# Altium PCB PCB1.PcbDoc
Units mm, origin at the board's own origin, x right, y up, seen from the top; angles counter-clockwise.
Board outline 43.5 x 43.5 mm, 2 copper layers (Top Layer, Bottom Layer), stack 1.57 mm thick; 59 components, 40 nets, 191 pads, 27 vias.
Unrouted connection lines stored in the file: 38.
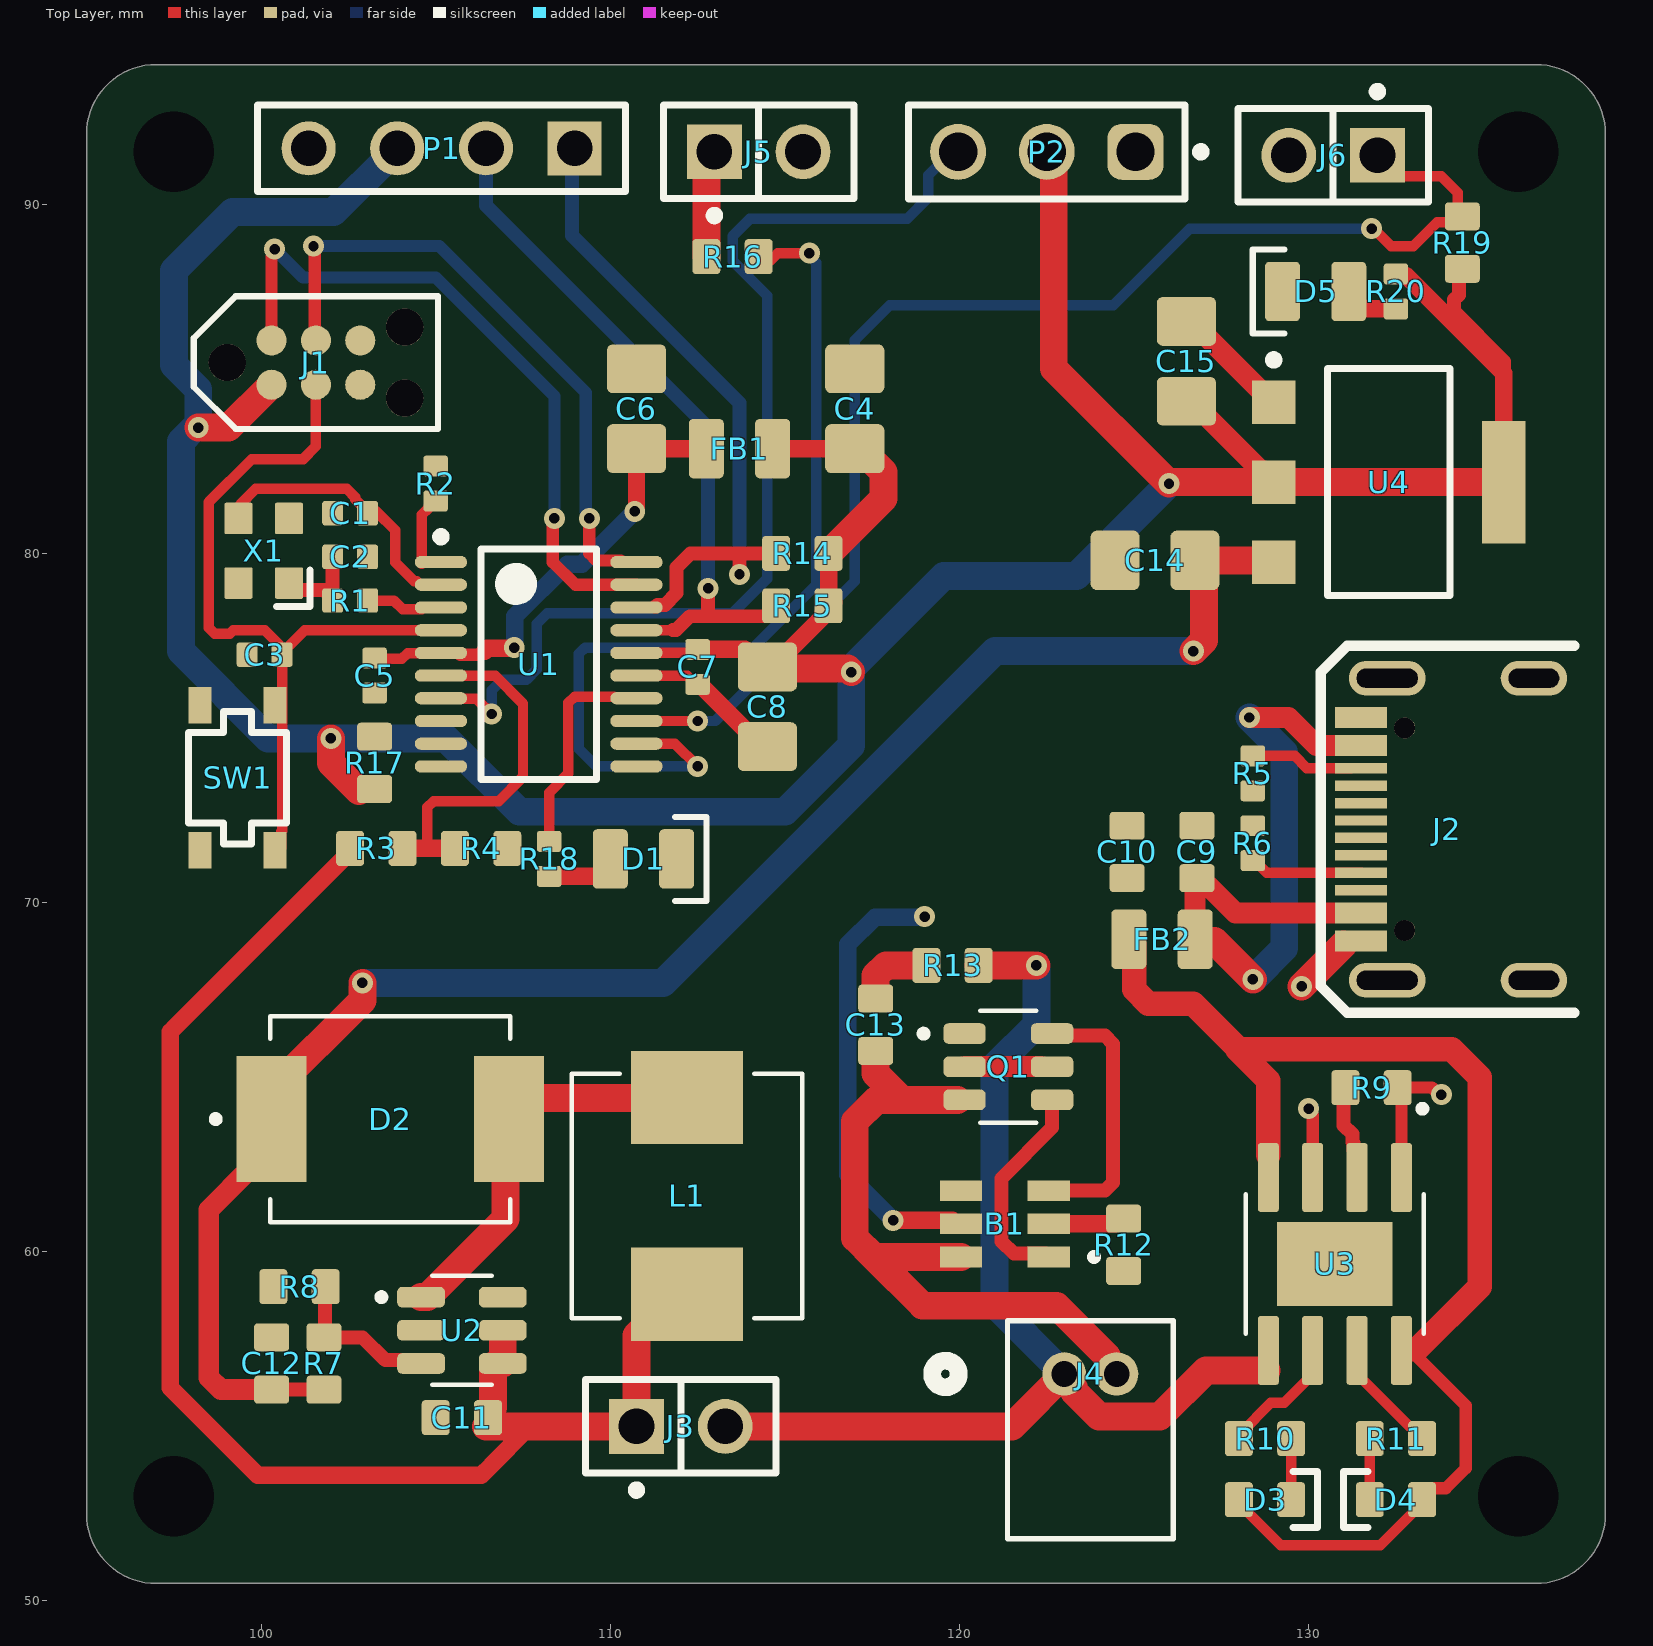
[diagram p0: Top Layer view]
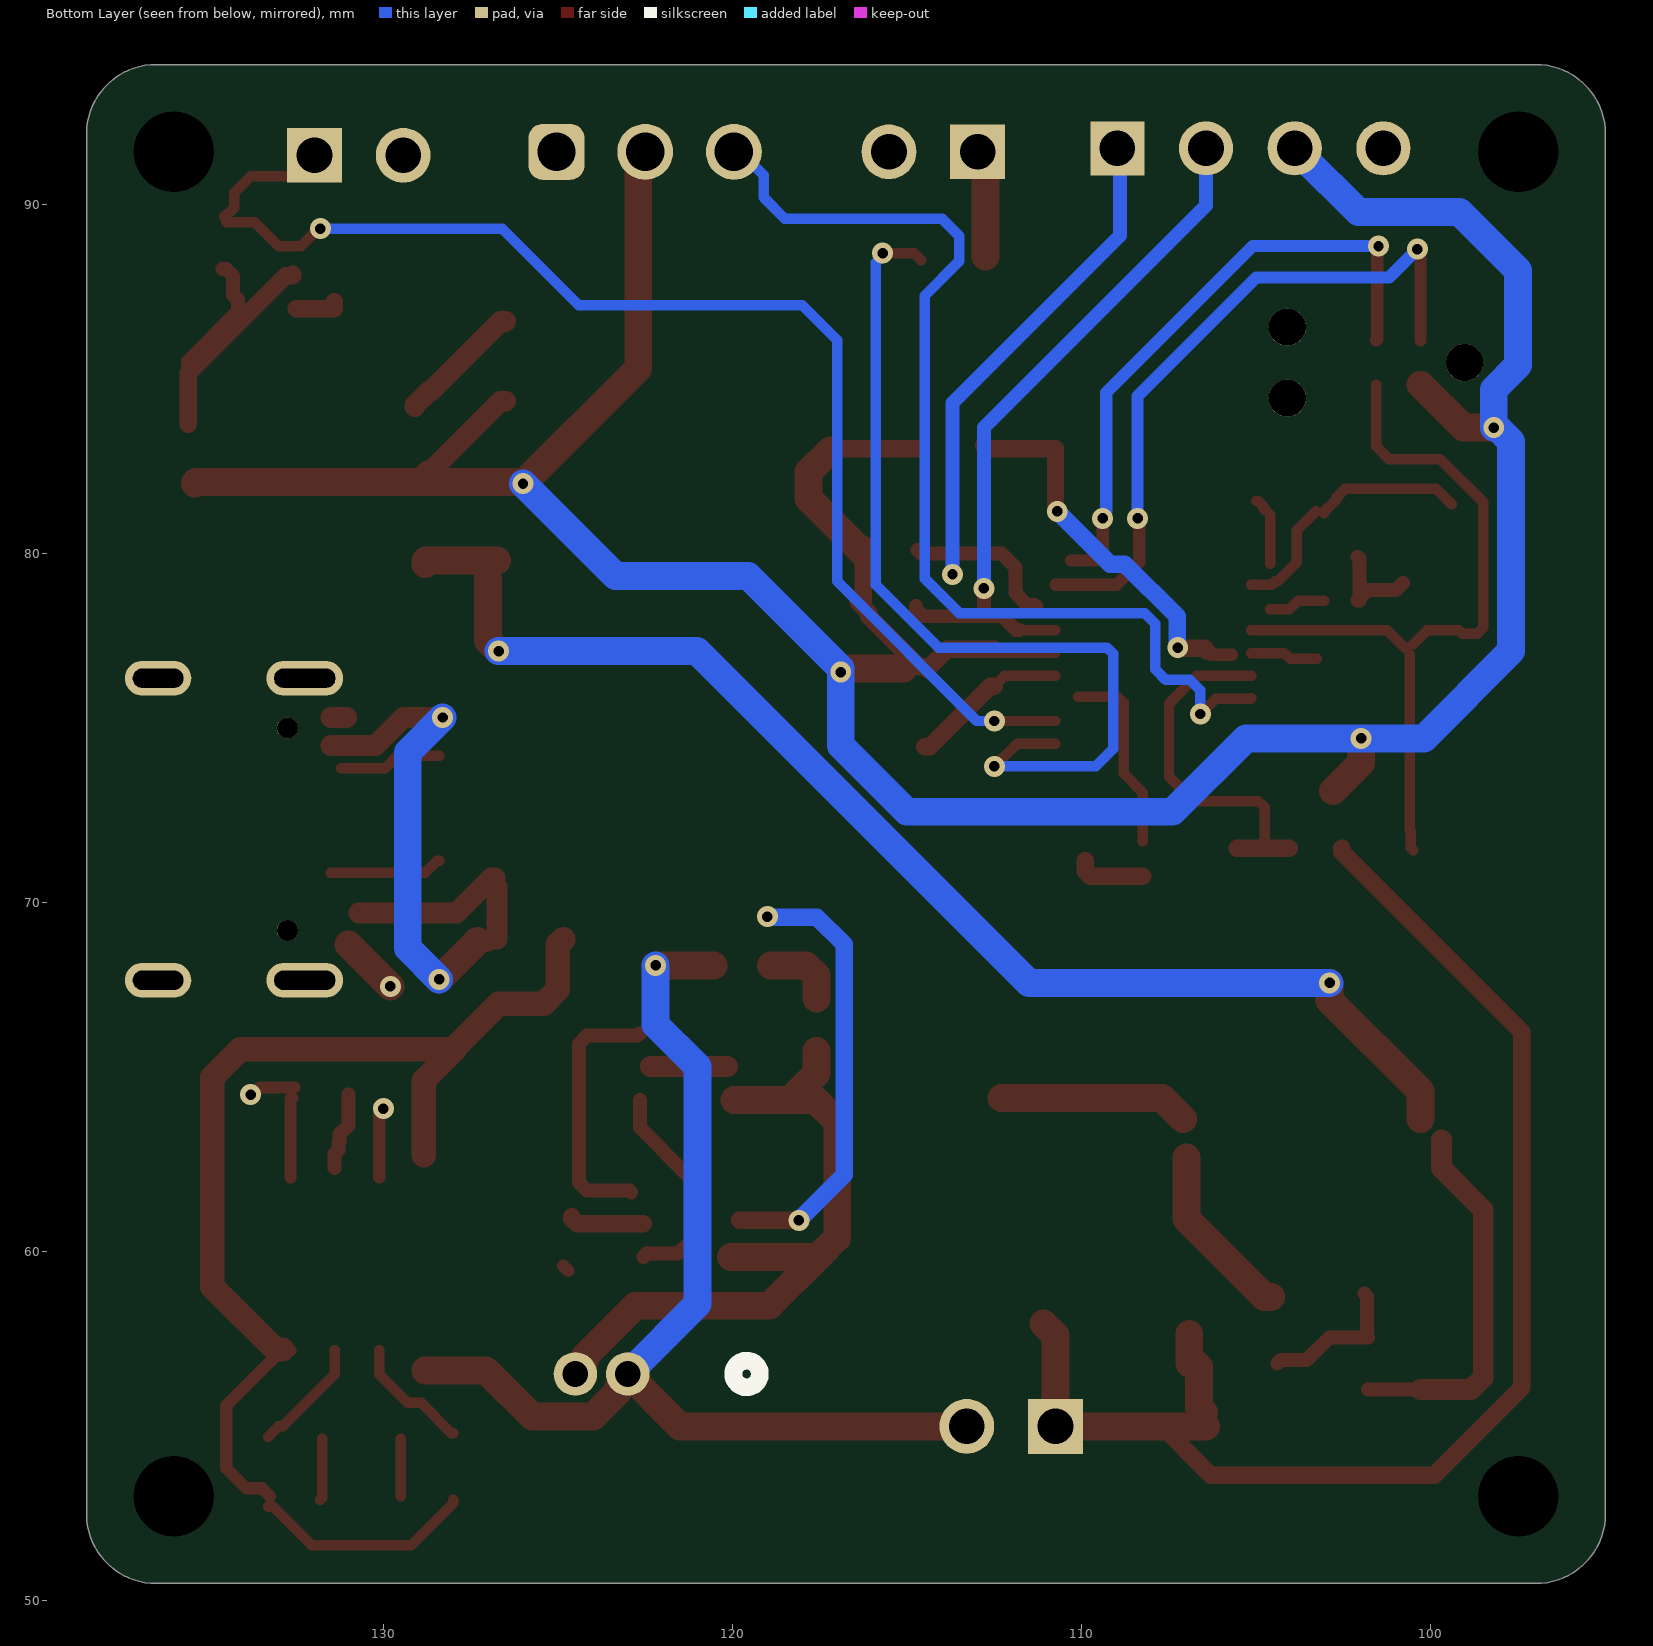
[diagram p1: Bottom Layer view, seen from below]
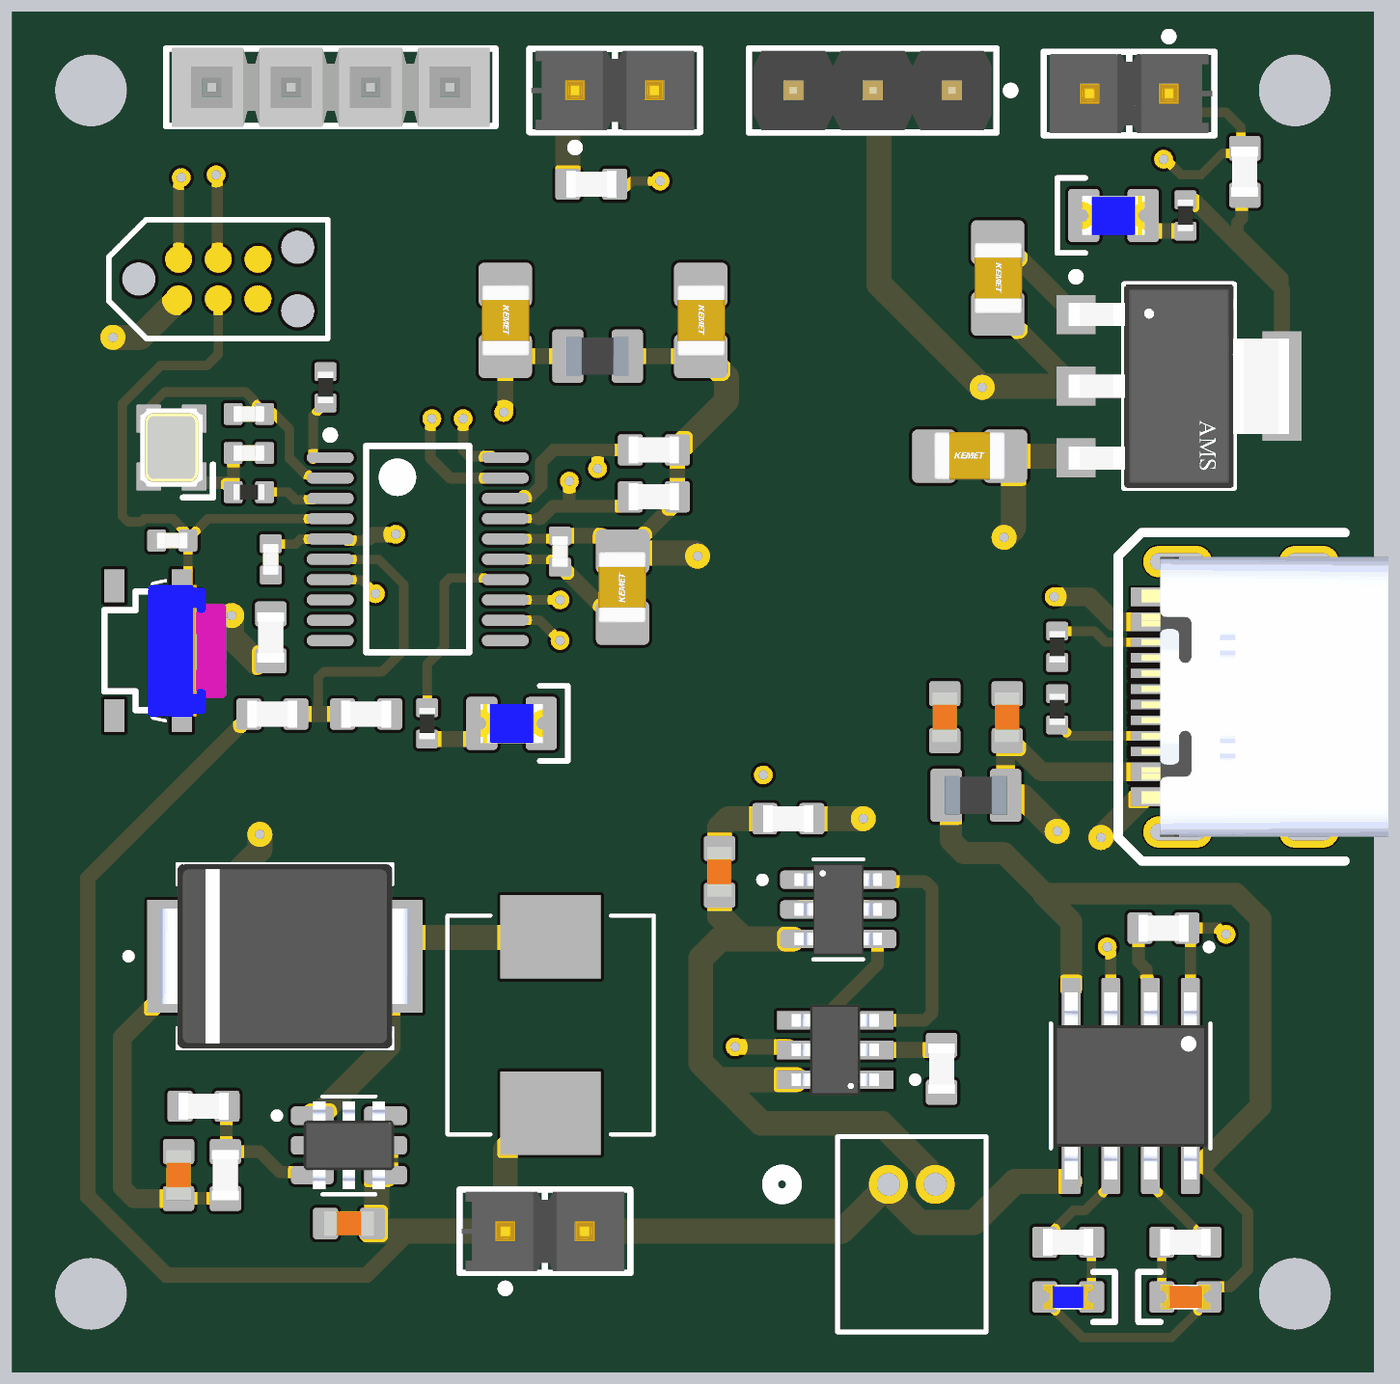
[diagram p2: 3D render of the assembled board from above, using the file's embedded part models]

## Layer stack, top to bottom
Top Solder: solder mask 0.0127, Solder Resist, Dk 3.5
Top Layer: signal copper 0.035
Dielectric 1: dielectric 1.5, FR-4, Dk 4.8
Bottom Layer: signal copper 0.035
Bottom Solder: solder mask 0.0127, Solder Resist, Dk 3.5

## Board outline
95,52.5 95,92 cw(c97,92) 97,94 136.5,94 cw(c136.5,92) 138.5,92 138.5,52.5 cw(c136.5,52.5) 136.5,50.5 97,50.5 cw(c97,52.5)

## Design rules (kind name [scope] priority, off if disabled: settings)
BoardOutlineClearance [All] p1: gap=0.2 ignorepadtopadclearanceinfootprint=FALSE
Clearance [All] p1: gap=0.2 ignorepadtopadclearanceinfootprint=FALSE
ComponentClearance [All] p1: gap=0.127 collisioncheckmode=3 verticalgap=0.127 showdistances=TRUE
DiffPairsRouting [All] p1: maxlimit=0.254 minlimit=0.127 mostfreqgap=0.127 toplayer_minwidth=0.127 toplayer_maxwidth=25.4 toplayer_prefwidth=0.127 bottomlayer_minwidth=0.127 bottomlayer_maxwidth=25.4 bottomlayer_prefwidth=0.127 maxuncoupledlength=12.7
Height [All] p1: minheight=0 maxheight=1816.048 prefheight=12.7
HoleSize [All] p1: absolutevalues=TRUE maxlimit=6.3 minlimit=0.3 maxpercent=80.000 minpercent=20.000
HoleToHoleClearance [All] p1: gap=0.25 allowstackedmicrovias=FALSE
MinimumAnnularRing [All] p1: minimumring=0.3
MinimumSolderMaskSliver [All] p1: minsoldermaskwidth=0
PlaneClearance [All] p1: clearance=0.127
PlaneConnect PlaneConnectPowerPads [InPadClass('PowerPads')] p1: planeconnectstyle=Direct reliefexpansion=0.508 reliefentries=4 reliefconductorwidth=0.254 reliefairgap=0.254
PlaneConnect [All] p2: pad.planeconnectstyle=Relief pad.reliefexpansion=0.3 pad.reliefentries=4 pad.reliefconductorwidth=0.127 pad.reliefairgap=0.127 via.planeconnectstyle=Direct via.reliefexpansion=0.3 via.reliefentries=4 via.reliefconductorwidth=0.127 via.reliefairgap=0.127
PolygonConnect PolygonConnectPowerPads [All vs (InPadClass('PowerPads'))] p1: connectstyle=Direct reliefconductorwidth=0.254 reliefentries=4 polygonreliefangle="90 Angle" airgapwidth=0.254
PolygonConnect [All] p2: thpad.connectstyle=Relief thpad.reliefconductorwidth=0.127 thpad.reliefentries=4 thpad.polygonreliefangle="90 Angle" thpad.airgapwidth=0.127 smdpad.connectstyle=Relief smdpad.reliefconductorwidth=0.127 smdpad.reliefentries=4 smdpad.polygonreliefangle="90 Angle" smdpad.airgapwidth=0.127 via.connectstyle=Direct via.reliefconductorwidth=0.127 via.reliefentries=4 via.polygonreliefangle="90 Angle" via.airgapwidth=0.127
RoutingVias [All] p1: holewidth=0.3 width=0.6 viastyle="Through Hole" minholewidth=0.3 minwidth=0.6 maxholewidth=0.6 maxwidth=6.6
SilkToSilkClearance [All] p1: silktosilkclearance=0
SilkToSolderMaskClearance [IsPad] p1: minsilkscreentomaskgap=0.127 clearancetoexposedcopper=TRUE
SolderMaskExpansion SolderMaskExpansion_TENted [IsVia] p1: expansion=0.102 istentingtop=FALSE
SolderMaskExpansion [All] p2: expansion=0.102 istentingtop=FALSE
SupplyNets "Schematic Supply Nets_4" [InNet('+3V3A')] p1: voltage=0.000
SupplyNets "Schematic Supply Nets_3" [InNet('+5_IN')] p2: voltage=0.000
SupplyNets "Schematic Supply Nets_2" [InNet('GND')] p3: voltage=0.000
SupplyNets "Schematic Supply Nets_1" [InNet('+5')] p4: voltage=0.000
SupplyNets "Schematic Supply Nets" [InNet('+3V3')] p5: voltage=0.000
UnRoutedNet [All] p1: checkbadconnections=TRUE
Width [All] p1: maxlimit=1 minlimit=0.2 preferedwidth=0.3 minimp=50.000000 maximp=50.000000 favimp=50.000000
19 further rules are at their usual default settings.

## Classes and differential pairs
component class MCU: C1 C2 C3 C4 C5 C6 C7 C8 D1 FB1 J1 R1 R2 R3 R4 R18 SW1 U1 X1
component class Conectors: J5 J6 P1 P2 R14 R15 R16 R17 R19
component class Battery_Management: B1 C9 C10 C11 C12 C13 C14 C15 D2 D3 D4 D5 FB2 J2 J3 J4 L1 Q1 R5 R6 R7 R8 R9 R10 R11 R12 R13 R20 U2 U3 U4

## Components (designator, comment, footprint, x,y, rotation, side; value= is the part's Value field where it differs from the comment)
B1 "FS312F-G" SOT95P280X145-6N#1 121.3,60.8 r180 top
C1 "12 pF" CAP_0402 102.55,81.15 r180 top
C2 "12 pF" CAP_0402 102.55,79.9 r0 top
C3 "100 nF" CAP_0402 100.1,77.1 r180 top
C4 "1 uF" CAP_0805 117,84.143 r270 top
C5 "10 nF" CAP_0402 103.25,76.5 r90 top
C6 "1 uF" CAP_0805 110.75,84.143 r270 top
C7 "100 nF" CAP_0402 112.5,76.75 r90 top
C8 "1 uF" CAP_0805 114.5,75.607 r90 top
C9 "100n" CAP_0603 126.8,71.45 r270 top
C10 "100n" CAP_0603 124.8,71.45 r270 top
C11 "22u" CAP_0603 105.75,55.25 r180 top
C12 "22u" CAP_0603 100.3,56.8 r90 top
C13 "0.1u" CAP_0603 117.6,66.5 r90 top
C14 "10u" CAP_0805 125.6,79.8 r0 top
C15 "22u" CAP_0805 126.5,85.5 r270 top
D1 "BLUE" LED_0805_BLUE 110.95,71.25 r180 top
D2 "SS34" DIO_SS34 103.7,63.8 r0 top
D3 "BLUE" LED_0603_BLUE 128.75,52.9 r180 top
D4 "RED" LED_0603_RED 132.5,52.9 r0 top
D5 "BLUE" LED_0805_BLUE 130.2,87.5 r0 top
FB1 "120R" FB_0805 113.7,83 r180 top
FB2 "120R" FB_0805 125.8,68.95 r180 top
J1 "TC2030-NL" TC2030-NL-FP 101.57,85.465 r0 top
J2 "TYPE-C-31-M-12" TYPE-C-31-M-12 134.35,72.1 r90 top
J3 "TSW-102-14-G-S" FP-TSW-102-14-G-S-MFG 112.02,55 r0 top
J4 "S2B-ZR(LF)(SN)" CONN_S2B-ZR_JST 123,56.5 r0 top
J5 "TSW-102-14-G-S" FP-TSW-102-14-G-S-MFG 114.25,91.5 r0 top
J6 "TSW-102-14-G-S" FP-TSW-102-14-G-S-MFG 130.7,91.4 r180 top
L1 "MWSA0603S-220MT" INDM7066X300N 112.2,61.6 r90 top
P1 "HMTSW-104-23-F-S-237" SMTC-HMTSW-104-23-X-S-237 108.98,91.6 r180 top
P2 "61300311121" 61300311121 122.5,91.5 r180 top
Q1 "FS8205" SOT95P280X145-6N#2 121.4,65.3 r0 top
R1 "0R" RES_0402 102.55,78.65 r180 top
R2 "100K" RES_0402 105,82 r90 top
R3 "100k" RES_0603 103.3,71.55 r180 top
R4 "100k" RES_0603 106.3,71.55 r180 top
R5 "5.1k" RES_0402 128.4,73.7 r90 top
R6 "5.1k" RES_0402 128.4,71.7 r270 top
R7 "160k" RES_0603 101.8,56.8 r270 top
R8 "22K" RES_0603 101.1,59 r0 top
R9 "1.3K" RES_0603 131.8,64.7 r180 top
R10 "1K" RES_0603 128.75,54.65 r0 top
R11 "1K" RES_0603 132.5,54.65 r180 top
R12 "2K" RES_0603 124.7,60.2 r90 top
R13 "100" RES_0603 119.8,68.2 r0 top
R14 "4.7K" RES_0603 115.5,80 r0 top
R15 "4.7K" RES_0603 115.5,78.5 r0 top
R16 "120" RES_0603 113.5,88.5 r180 top
R17 "12K" RES_0603 103.25,74 r90 top
R18 "270R" RES_0402 108.25,71.25 r270 top
R19 "4.7K" RES_0603 134.4,88.9 r90 top
R20 "270R" RES_0402 132.5,87.5 r270 top
SW1 "SKRPANE010" SKRPANE010 99.325,73.575 r270 top
U1 "STM32F030F4P6" STM-TSSOP20_L 107.95,76.825 r0 top
U2 "MT3608" SOT95P280X145-6N#3 105.75,57.75 r0 top
U3 "TP4056" SOP127P600X175-9N 130.75,59.65 r270 top
U4 "AMS1117-3.3" FP-AMS1117-IPC_C 132.295,82.04 r0 top
X1 "12 MHZ" XTAL_2520 100.075,80.075 r90 top

## Footprints (in the part's own frame and the unit in brackets; to place one, negate y for a bottom-side part, rotate by r counter-clockwise, add the part's x,y. Pads: shape width x height; smd on the part's side, far side on the other; paste and mask are expansions set on the pad)
61300311121 [mm] "Pin Header, pitch 2.54 mm, THT, Vertical, single row, 3p"
  rrect50% 1.6x1.6 hole 1.1: 1(-2.54,0)
  round 1.6 hole 1.1: 2(0,0) 3(2.54,0)
  silkscreen extent -4.53,-1.35 3.96,1.35, body extent -3.81,-1.27 3.81,1.27, height 8.57
CAP_0402 [mm]
  rrect25% 0.6x0.7 smd: 1(-0.5,0) 2(0.5,0)
  body extent -0.5,-0.26 0.5,0.26, height 0.37
CAP_0603 [mm]
  rrect25% 0.8x1 smd: 1(-0.75,0) 2(0.75,0)
  body extent -0.8,-0.4 0.8,0.4, height 0.51
CAP_0805 [mm]
  rrect25% 1.4x1.7 smd: 1(-1.143,0) 2(1.143,0)
  body extent -1.15,-0.76 1.15,0.79, height 1.01
CONN_S2B-ZR_JST [mil]
  round 49 / inner round 60 / far side round 49 hole 29 paste-99999 mask+0: 1(0,0) 2(59.06,0)
  silkscreen extent -149,-186 123,60
DIO_SS34 [mm]
  rect 2x3.6 smd: A(3.4,0) C(-3.4,0)
  silkscreen extent -5.1,-2.95 3.44,2.95, body extent -3.98,-2.95 3.98,2.95, height 2.65
FB_0805 [mm]
  rrect25% 1x1.7 smd: 1(-0.95,0) 2(0.95,0)
  body extent -1,-0.63 1,0.63, height 0.86
FP-AMS1117-IPC_C [mm]
  rect 1.25x1.25 smd paste+0 mask+0: 1(-3.295,2.29) 2(-3.295,0) 3(-3.295,-2.29)
  rect 1.25x3.5 smd paste+0 mask+0: 4(3.295,0)
  silkscreen extent -3.42,-3.25 1.75,3.62, body extent -3.9,-3.35 3.9,3.35, height 0.25
FP-TSW-102-14-G-S-MFG [mm]
  rect 1.57x1.57 hole 1.02 paste-2539.97 mask+0: 1(-1.27,0)
  round 1.57 hole 1.02 paste-2539.97 mask+0: 2(1.27,0)
  silkscreen extent -2.73,-1.95 2.73,1.34, body extent -2.83,-1.44 2.83,1.44, height 0.25
INDM7066X300N [mm]
  rect 2.67x3.21 smd: 1(-2.82,0) 2(2.82,0)
  silkscreen extent -3.5,-3.3 3.5,3.3
LED_0603_BLUE [mm]
  rrect25% 0.8x1 smd: A(0.75,0) K(-0.75,0)
  silkscreen extent -1.5,-0.8 -0.8,0.8, body extent -0.8,-0.4 0.8,0.4, height 0.6
LED_0603_RED [mm]
  rrect25% 0.8x1 smd: A(0.75,0) K(-0.75,0)
  silkscreen extent -1.5,-0.8 -0.8,0.8, body extent -0.8,-0.4 0.8,0.4, height 0.6
LED_0805_BLUE [mm]
  rrect25% 1x1.7 smd: A(0.95,0) K(-0.95,0)
  silkscreen extent -1.8,-1.2 -0.9,1.2, body extent -1,-0.63 1,0.63, height 1.12
RES_0402 [mm]
  rrect25% 0.6x0.7 smd: 1(-0.5,0) 2(0.5,0)
  body extent -0.5,-0.25 0.5,0.25, height 0.3
RES_0603 [mm]
  rrect25% 0.8x1 smd: 1(-0.75,0) 2(0.75,0)
  body extent -0.8,-0.43 0.8,0.43, height 0.52
SKRPANE010 [mm]
  rect 1.05x0.65 smd: 12(-2.075,1.075) 12(2.075,1.075) 34(-2.075,-1.075) 34(2.075,-1.075)
  silkscreen extent -1.9,-1.4 1.9,1.4, body extent -2.3,-1.6 2.3,1.6, height 2.51
SMTC-HMTSW-104-23-X-S-237 [mm] "Terminal Strip, 1x2 Pins, Vertical, 2.54mm Pitch, Male"
  rect 1.55x1.55 hole 1.02: 1(0,0)
  round 1.55 hole 1.02: 2(2.54,0) 3(5.08,0) 4(7.62,0)
  silkscreen extent -1.46,-1.24 9.08,1.24, body extent -1.27,-1.27 8.89,1.27, height 8.56
SOP127P600X175-9N [mm]
  rrect25% 1.97x0.6 smd: 1(-2.475,1.905) 2(-2.475,0.635) 3(-2.475,-0.635) 4(-2.475,-1.905) 5(2.475,-1.905) 6(2.475,-0.635) 7(2.475,0.635) 8(2.475,1.905)
  rect 2.413x3.302 smd paste-3: 9(0,0)
  silkscreen extent -4.54,-2.55 2,2.6, body extent -3,-2.45 3,2.45, height 1.75
SOT95P280X145-6N#1 [mm]
  rect 1.21x0.59 smd: 1(-1.255,0.95) 2(-1.255,0) 3(-1.255,-0.95) 4(1.255,-0.95) 5(1.255,0) 6(1.255,0.95)
  silkscreen extent -2.66,0.85 -2.46,1.05, body extent -1.4,-1.45 1.4,1.45, height 1.45
SOT95P280X145-6N#2 [mm]
  rrect50% 1.21x0.59 smd: 1(-1.255,0.95) 2(-1.255,0) 3(-1.255,-0.95) 4(1.255,-0.95) 5(1.255,0) 6(1.255,0.95)
  silkscreen extent -2.53,-1.6 0.8,1.6, body extent -1.4,-1.45 1.4,1.45, height 1.45
SOT95P280X145-6N#3 [mm]
  rrect50% 1.37x0.59 smd: 1(-1.17,0.95) 2(-1.17,0) 3(-1.17,-0.95) 4(1.17,-0.95) 5(1.17,0) 6(1.17,0.95)
  silkscreen extent -2.4,-1.57 0.85,1.57, body extent -1.45,-1.4 1.45,1.4, height 1.45
STM-TSSOP20_L [mm] "SOP, 20-Leads, Body 6.6x4.5mm, Pitch 0.65mm, IPC High Density"
  oval 1.5x0.35 smd: 1(-2.8,2.925) 2(-2.8,2.275) 3(-2.8,1.625) 4(-2.8,0.975) 5(-2.8,0.325) 6(-2.8,-0.325) 7(-2.8,-0.975) 8(-2.8,-1.625) 9(-2.8,-2.275) 10(-2.8,-2.925) 11(2.8,-2.925) 12(2.8,-2.275) 13(2.8,-1.625) 14(2.8,-0.975) 15(2.8,-0.325) 16(2.8,0.325) 17(2.8,0.975) 18(2.8,1.625) 19(2.8,2.275) 20(2.8,2.925)
  silkscreen extent -2.92,-3.3 1.65,3.77, body extent -2.25,-3.3 2.25,3.3, height 1.2
TC2030-NL-FP [mil]
  round 33.98 smd paste-16.99: 1(-50,-25) 2(-50,25) 3(0,-25) 4(0,25) 5(50,-25) 6(50,25)
  round 42.01 hole 42.01 unplated: MH(-100,0) MH(100,-40) MH(100,40)
  silkscreen extent -138,-75 138,75
TYPE-C-31-M-12 [mm]
  rect 0.6x1.5 smd mask+0.07: A1B12(-3.2,2.85) B1A12(3.2,2.85)
  rect 0.6x1.5 smd mask+0.14: A4B9(-2.4,2.85) B4A9(2.4,2.85)
  rect 0.3x1.5 smd mask+0.14: A5(-1.25,2.85) A6(-0.25,2.85) A7(0.25,2.85) A8(1.25,2.85) B5(1.75,2.85) B6(0.75,2.85) B7(-0.75,2.85) B8(-1.75,2.85)
  round 0.6 hole 0.6 unplated mask+0.3: MH(-2.9,1.6) MH(2.9,1.6)
  oval 1x1.9 hole 0.55 slot 1.45 at 90 deg mask+0.05: SH(-4.325,-2.1) SH(4.325,-2.1)
  oval 1x2.2 hole 0.55 slot 1.75 at 90 deg mask+0.05: SH(-4.325,2.1) SH(4.325,2.1)
  silkscreen extent -5.25,-3.25 5.25,4, body extent -4.47,-4.65 4.47,3.25, height 3.32
XTAL_2520 [mm]
  rrect10% 0.9x0.8 smd mask+0: 1(-0.925,-0.725) 2(0.925,-0.725) 3(0.925,0.725) 4(-0.925,0.725)
  silkscreen extent -1.6,-1.33 -0.54,-0.36, body extent -1.25,-1 1.25,1, height 0.8

## Part data
B1: "One Cell Lithium-ion/Polymer Battery Protection IC", Manufacturer_Name="Fortune Semiconductor Corporation", Datasheet Link=https://www.ic-fortune.com/upload/Download/FS312F-G-DS-12_EN.pdf, Geometry.Height=1.45mm, Manufacturer_Part_Number=FS312F-G
C1 C2 C3 C5 C7: library part CAP_0402, "Capacitor SMD 0402"
C4 C6 C8 C14 C15: library part CAP_0805, "Capacitor SMD 0805"
C9 C10 C11 C12 C13: library part CAP_0603, "Capacitor SMD 0603"
D1 D5: library part LED_0805_BLUE, "LED 0805 BLUE SMD"
D2: "3A, 40V, Schottky Rectifier", Package="DO-214AB-2 Taiwan Semiconductor", Check_prices=https://www.snapeda.com/parts/SS34/Taiwan+Semiconductor/view-part/?ref=eda, MF="Taiwan Semiconductor", MP=SS34, SnapEDA_Link=https://www.snapeda.com/parts/SS34/Taiwan+Semiconductor/view-part/?ref=snap
D3: library part LED_0603_BLUE, "LED 0603 BLUE SMD"
D4: library part LED_0603_RED, "LED 0603 RED SMD"
FB1: library part FB_0805, "Ferrite Bead SMD 0805GZ2012D121TF", Manufacturer Part Number=PZ2012D121-3R0TF
FB2: library part FB_0805, "Ferrite Bead SMD 0805", Manufacturer Part Number=PZ2012D121-3R0TF
J1: "Tag-Connect No-Solder SWD Debug Connector (No Legs) DO NOT PLACE", Manufacturer=Tag-Connect, Manufacturer Part Number=TC2030-NL-FP
J2: "USB Type C Connector Horizontal SMT", Manufacturer="Koren Hroparts", Manufacturer Part Number=TYPE-C-31-M-12
J3 J5 J6: library part CMP-02766-001740-1, "CONN HEADER VERT 2POS 2.54MM", Color=Black, Flammability Rating="UL94 V-0", Max Current Rating=7.6A, Max Operating Temperature=125°C, Max Voltage Rating (AC)=550V, Min Operating Temperature=-55°C, Package Quantity=1, Connector Type=Header, Contact Finish - Mating=GOLD, Contact Material=Bronze, Contact Mating Length=0.32inch, Contact Plating=Gold, Contact Shape=Square, Contact Type="Male Pin", Depth=2.54mm, Fastening Type=Pull, Gender=Male, Housing Color=Black, Housing Material=Polyester, Insulation Color=Black, Insulation Material=PBT, Lead Free="Lead Free", Length=5.08mm, Mount="Through Hole", Number of Contacts=2, Number of Positions=2, Number of Rows=1, Orientation=Straight, Packaging=Bulk, Pitch=2.54mm, Radiation Hardening=No, REACH SVHC="No SVHC", RoHS Compliant=Yes, Series=TSW, Termination=Solder, Width=2.54mm
J4: library part S2B-ZRLFSN, "Description", Manufacturer_Name=JST, Copyright="Copyright (C) 2025 Ultra Librarian. All rights reserved.", Manufacturer_Part_Number=S2B-ZR(LF)(SN), RefDes=RefDes, Type=Type
L1: "22 ÂµH Unshielded Drum Core, Wirewound Inductor 2.5 A 170mOhm Max Nonstandard -", Package=None, Check_prices=https://www.snapeda.com/parts/MWSA0603S-220MT/Shenzhen+Huacan+Tianlu+Electronics+Co.%252C+Ltd./view-part/?ref=eda, MF="Shenzhen Sunlord Electronics Co., Ltd.", MP=MWSA0603S-220MT, SnapEDA_Link=https://www.snapeda.com/parts/MWSA0603S-220MT/Shenzhen+Huacan+Tianlu+Electronics+Co.%252C+Ltd./view-part/?ref=snap
P1: library part CMP-1024-00021-1, "Modified .025\" SQ Post Header, Through-hole, Vertical, -55 to 125 degC, 2.54 mm Pitch, 4-Pin, Male, RoHS", Manufacturer=Samtec, Temperature Range="-55 to 125 degC", ComponentLink1Description="Manufacturer URL", ComponentLink1URL=http://www.samtec.com, ComponentLink2Description=Datasheet, ComponentLink2URL=http://www.samtec.com/documents/webfiles/pdf/HMTSW.PDF, ComponentLink3Description="Package Specification", ComponentLink3URL=http://www.samtec.com/documents/webfiles/cpdf/HMTSW-XXX-XX-X-X-XXXX-XX-XX-MKT1.pdf, DatasheetVersion=F-214, Mounting Technology=Through-hole, Orientation=Vertical, PackageDescription="Assembly .025 [.64] SQ. Post Hi-Temp Terminal Strip", PackageReference=HMTSW-104-23-X-S-237, PackageVersion="AL, 3/1987", PartNumber=HMTSW-104-23-F-S-237, Pitch="2.54 mm", RoHS=True
P2: library part CMP-1502-01062-3, Color=Black, Contact Resistance=20mΩ, Current Rating=3A, Max Operating Temperature=105°C, Min Operating Temperature=-40°C, Operating Supply Voltage=250V, Connector Type="Male Pin", Contact Material=Copper, Contact Mating Length=5.9944mm, Contact Plating=Gold, Gender=Male, Height=8.94mm, Lead Free="Lead Free", Lead Pitch=2.54mm, Mount="Through Hole", NexarPartId=32855521, Number of Contacts=3, Number of Pins=3, Number of Positions=3, Number of Rows=1, Orientation=Vertical, Packaging=Bulk, Pitch=2.54mm, REACH SVHC=Unknown, RoHS=Compliant, Termination=Solder, Voltage Rating=250V
Q1: "ÐœÐžÐŸ-Ñ‚Ñ€Ð°Ð½Ð·Ð¸ÑÑ‚Ð¾Ñ€ Ñ Ð´Ð²Ð¾Ð¹Ð½Ñ‹Ð¼ N-ÐºÐ°Ð½Ð°Ð»ÑŒÐ½Ñ‹Ð¼ Ñ€ÐµÐ¶Ð¸Ð¼Ð¾Ð¼ ÑƒÑÐ¸Ð»ÐµÐ½Ð¸Ñ Ð¼Ð¾Ñ‰Ð½Ð¾ÑÑ‚Ð¸", Package=Package, Check_prices=https://www.snapeda.com/parts/FS8205/Fortune+Semiconductor/view-part/?ref=eda, MF="Fortune Semiconductor", MP=FS8205, SnapEDA_Link=https://www.snapeda.com/parts/FS8205/Fortune+Semiconductor/view-part/?ref=snap
R1 R2 R5 R6 R18 R20: library part RES_0402, "Resistor SMD 0402"
R3 R4 R7 R8 R9 R10 R11 R12 R13 R14 R15 R16 R17 R19: library part RES_0603, "Resistor SMD 0603"
SW1: "Tactile Switch SMD SPST", Manufacturer="Alps Alpine", Manufacturer Part Number=SKRPANE010
U1: library part CMP-0304-00039-2, "ARM Cortex-M0 32-bit MCU, 16 KB Flash, 4 KB Internal RAM, 15 I/Os, 20-pin TSSOP, -40 to 85 degC, Tube", I/Os (High Current)=15, Operating Frequency(F) (Processor speed) (MHz)=48, Supply Voltage(Vcc) min (V)=2.4, ComponentLink1Description="Manufacturer URL", ComponentLink1URL=http://www.st.com/web/en/home.html, ComponentLink2Description=Datasheet, ComponentLink2URL=http://www.st.com/st-web-ui/static/active/en/resource/technical/document/datasheet/DM00088500.pdf, ComponentLink3Description="Package Specification", ComponentLink3URL=http://www.st.com/st-web-ui/static/active/en/resource/technical/document/datasheet/DM00065136.pdf, Core="ARM Cortex-M0", DatasheetVersion="Rev. 1", FLASH Size (Prog) (kB)=16, Internal RAM Size (kB)=4, Mounting Technology="Surface Mount", PackageDescription="20-Pin Thin Shrink Small Outline Package, 6.5 x 4.4 mm Body, 0.65 mm Pitch", PackageReference=TSSOP20, PackageVersion="Rev. 1, 11/2012", Packing=Tube, PartNumber=STM32F030F4P6
U2: "High Efficiency 1.2MHz2A Step Up Converter", Package=Package, Availability="Not in stock", Check_prices=https://www.snapeda.com/parts/MT3608/Aerosemi+Technology+Co.%252C+Ltd/view-part/?ref=eda, MF="Aerosemi Technology Co., Ltd", MP=MT3608, Price=None, SnapEDA_Link=https://www.snapeda.com/parts/MT3608/Aerosemi+Technology+Co.%252C+Ltd/view-part/?ref=snap
U3: "Complete single cell Li-Ion battery with a constant current / constant voltage linear charger", Package=Package, Availability="Not in stock", Check_prices=https://www.snapeda.com/parts/TP4056/NanJing+Top+Power+ASIC+Corp./view-part/?ref=eda, MF="NanJing Top Power ASIC Corp.", MP=TP4056, Price=None, SnapEDA_Link=https://www.snapeda.com/parts/TP4056/NanJing+Top+Power+ASIC+Corp./view-part/?ref=snap
U4: library part CMP-209535-000001-1, "LDO Voltage Regulators 1A, 3.3V", Dropout Voltage=1.1V, Manufacturer="Advanced Monolithic Systems", Max Junction Temp=+125°C, Max Power Dissipation=1.2W, Max Supply Voltage=15V, Nominal Supply Current=5mA, Output Current=1A, Output Voltage=3.3V, Package=AMS1117, Temperature="-40°C to +125°C", Temperature Range Low=-40°C, Automotive=No, Category=IC, ComponentLink2Description=Datasheet, ComponentLink2URL=http://www.advanced-monolithic.com/pdf/ds1117.pdf, Device Class L1="Integrated Circuits (ICs)", Device Class L2="Power Management ICs", Device Class L3="Voltage Regulators - Linear", Height=1.8mm, Ipc Land Pattern Name=SOT229P700X180-4, Lead Free=Yes, Manufacturer Part Number=AMS1117-3.3, Number Of Outputs=1, Octopart=https://octopart.com/ams1117-3.3-advanced+monolithic+systems-25899300, Output Type=Fixed, RoHS=TRUE, Standoff Height=0.64mm, Temperature Range High=+125°C
X1: library part XTAL_2520, "Crystal SMD 2520", Manufacturer Part Number=HY12MSMD2520FA1R30

## Free pads (board coordinates)
  round 1.524 hole 2.3 unplated: MH(97.5,53) MH(97.5,91.5) MH(136,53) MH(136,91.5)

## Via types
v1: diameter 0.6, hole 0.3, Top Layer to Bottom Layer, 27 vias

## Nets (pads, with @x,y where several pads share a name; then routed paths per layer and width w, separated by ;. In a path a pad name is that pad's centre, name@x,y a point inside that pad or via, vN(x,y) a via of type N, cw(c..) or ccw(c..) an arc to the next point about the centre after c; other vN are vias at no path point)
+3V3: C4.2 C7.2 C8.2 C15.2 FB1.1 J1.1 P1.3 P2.2 R14.2 R15.2 R17.1 R19.1 R20.1 U1.16 U4.2 U4.4 | length 110.1
  Top Layer w0.3: U1.16 110.76,77.16 112.46,77.16 C7.2@112.5,77.2
  Top Layer w0.4: R19.1@134.6,88.15 134.5,88.15 134.3,87.95 134.3,87.4 134.166,87.266 134.166,86.934 135.6,85.5 U4.4@135.6,83.7
  Top Layer w0.5: C7.2 113.85,77.25 C8.2@114.425,76.675 ; C8.2 114.65,76.75 116.1,78.2 116.1,78.3 R15.2@116.4,78.6 ; FB1.1 C4.2@117.3,83 ; R15.2@116.25,78.65 R14.2 ; R20.1@132.6,88 132.6,87.95 132.792,87.95 135.59,85.152 U4.4@135.59,83.7
  Top Layer w0.6: C15.2 126.65,84.357 128.642,82.365 128.735,82.365 U4.2@129,82.1
  Top Layer w0.8: v1(98.2,83.6) 99.07,83.6 J1.1 ; v1(102,74.7) 102,74 R17.1@102.8,73.2 ; C8.2@115.1,76.7 116.8,76.7 v1(116.9,76.6) ; R14.2 116.25,80.1 116.35,80.1 117.819,81.569 117.819,82.331 C4.2@117.2,82.95 ; P2.2@122.7,91.5 122.653,91.453 122.653,91.13 122.7,91.084 122.7,85.3 v1(126,82) 126.04,82.04 U4.2 135.365,82.04 135.4,82.005 U4.4@135.4,82
  Bottom Layer w0.8: v1@98.1,83.6 97.7,83.2 97.7,77.2 100.2,74.7 v1(102,74.7) 105.3,74.7 107.4,72.6 115,72.6 116.9,74.5 v1(116.9,76.6) ; v1(98.2,83.6) 98.2,84.692 97.5,85.392 97.5,88.1 99.178,89.778 102.078,89.778 103.7,91.4 P1.3@104,91.4 ; v1@116.9,76.7 119.55,79.35 123.35,79.35 v1(126,82)
+3V3A: C5.2 C6.2 FB1.2 U1.5 | length 13
  Top Layer w0.3: C5.2@103.268,76.982 104.032,76.982 104.193,77.143 U1.5@105.143,77.143
  Top Layer w0.35: U1.5@105.7,77.1 106.3,77.1 106.4,77.2
  Top Layer w0.5: 106.4,77.2 106.481,77.281 107.231,77.281 v1(107.25,77.3) ; v1(110.7,81.2) 110.7,81.227 110.75,81.277 C6.2 ; C6.2@110.8,83 112.7,83 FB1.2@112.8,83.1
  Bottom Layer w0.5: v1(107.25,77.3) 107.269,77.319 107.269,78.198 108.761,79.689 109.189,79.689 v1(110.7,81.2)
+5: C12.1 C14.2 D2.C R7.2 U4.3 | length 47.8
  Top Layer w0.4: C12.1@100.35,56.05 R7.2
  Top Layer w0.6: D2.C@99.7,63.2 99.7,62.4 98.5,61.2 98.5,56.401 98.851,56.05 C12.1
  Top Layer w0.8: D2.C 100.3,64.6 102.9,67.2 v1(102.9,67.7) ; v1(126.7,77.2) 127,77.5 C14.2@127,79.3 ; C14.2 128.775,79.8 128.8,79.775 U4.3@128.8,79.7
  Bottom Layer w0.8: v1(102.9,67.7) 111.514,67.7 121.014,77.2 v1(126.7,77.2)
+5_IN: C10.2 D3.A D4.A FB2.2 U3.4 U3.8 | length 36.9
  Top Layer w0.3: D3.A 128,52.8 129.2,51.6 132.05,51.6 133.15,52.7 D4.A@133.3,52.7
  Top Layer w0.35: U3.8 132.925,57.175 134.5,55.6 134.5,53.8 133.925,53.225 133.475,53.225 D4.A@133.25,53
  Top Layer w0.7: FB2.2 125,68.8 125,67.51 125.41,67.1 126.7,67.1 128,65.8 ; U3.4@128.845,62.76 128.845,64.905 127.95,65.8 134.1,65.8 134.9,65 134.9,59 133.1,57.2 U3.8@132.9,57.2
BAT_IN_NEG: B1.6 C13.1 J4.2 Q1.3 | length 19.9
  Top Layer w0.8: C13.1 117.6,65.1 118.3,64.4 ; Q1.3@119.94,64.35 117.619,64.35 117,63.731 117,60.4 117.55,59.85 ; B1.6 117.55,59.85 ; J4.2 124.5,56.62 124.222,56.898 124.222,57.006 122.775,58.453 118.947,58.453 117.55,59.85
BAT_IN_POS: J3.2 J4.1 R13.2 U3.5 | length 32
  Top Layer w0.8: J3.2 121.5,55 J4.1@123.1,56.6 ; R13.2 v1(122.2,68.2) ; J4.1 123,56.38 123.278,56.102 123.278,55.994 123.994,55.278 125.736,55.278 127.058,56.6 U3.5@128.8,56.6
  Bottom Layer w0.8: v1(122.2,68.2) 122.2,66.5 121,65.3 121,58.5 J4.1@122.9,56.6
GND: C1.2 C2.2 C3.2 C4.1 C5.1 C6.1 C7.1 C8.1 C9.1 C10.1 C11.2 C12.2 C14.1 C15.1 D1.K D5.K J1.5 J2.A1B12 J2.B1A12 J5.2 J6.2 P1.4 P2.1 Q1.1 R2.2 R4.1 R5.1 R6.1 R8.1 R9.1 R12.1 SW1.34 U1.15 U2.2 U3.1 U3.3 U4.1 X1.2 X1.4 | length 16.2
  Top Layer w0.3: U1.15 112.2,76.5 C7.1@112.4,76.3
  Top Layer w0.35: R12.1 R12.1@124.85,59.6 ; v1(130,64.1) 130,64.032 130.115,63.917 U3.3 ; R9.1 133.532,64.7 133.732,64.5 v1(133.8,64.5) ; R9.1@132.6,64.4 132.63,64.4 132.655,64.375 U3.1
  Top Layer w0.5: C7.1@112.5,76.2 112.614,76.2 114.35,74.464 C8.1
  Top Layer w0.6: C15.1 126.65,86.643 128.638,84.655 128.675,84.655 129.1,84.23 U4.1@129.1,84.2 ; J2.B1A12@131.05,75.3 J2.B1A12
  Top Layer w0.8: v1(129.8,67.6) J2.A1B12@131,68.8
  Bottom Layer w0.35: v1@130,64.2 130.052,64.148 v1@130.115,64.148
MCU_BOOT: R2.1 U1.1 | length 2
  Top Layer w0.3: U1.1@104.6,79.7 104.6,81.1 104.8,81.3 104.8,81.35 104.95,81.5 R2.1
MCU_I2C_SDA: P1.1 R14.1 U1.18 | length 18.7
  Top Layer w0.4: U1.18@111.3,78.475 111.35,78.525 111.563,78.525 111.9,78.862 111.9,79.6 112.3,80 114.6,80 R14.1@114.7,80.1 ; v1(113.7,79.4) 113.7,80
  Bottom Layer w0.4: P1.1@108.9,91 108.9,89.1 113.7,84.3 v1(113.7,79.4)
MCU_NRST: C3.1 J1.3 SW1.12 U1.4 | length 21.7
  Top Layer w0.3: SW1.12@100.5,71.5 100.575,71.575 100.575,72.026 100.6,72.051 C3.1 ; C3.1@100.5,77.4 100.1,77.8 99.199,77.8 99.099,77.7 98.676,77.7 98.5,77.876 98.5,81.472 99.728,82.7 101.2,82.7 101.57,83.07 J1.3 ; C3.1@100.7,77.3 100.75,77.3 101.25,77.8 U1.4
MCU_OSC_IN: C1.1 U1.2 X1.3 | length 7.4
  Top Layer w0.3: X1.3@99.4,81.4 99.85,81.85 102.451,81.85 102.7,81.601 102.7,81.55 103.05,81.2 C1.1 ; C1.1@103.3,81.2 103.841,80.659 103.841,79.741 104.383,79.2 104.461,79.2 104.561,79.1 U1.2
MCU_OSC_OUT: R1.1 U1.3 | length 1.7
  Top Layer w0.3: R1.1 103.8,78.65 104.05,78.4 U1.3@104.6,78.4
MCU_SWCLK: J1.4 U1.20 | length 17.6
  Top Layer w0.35: v1(101.5,88.8) 101.535,88.765 101.535,86.135 J1.4 ; v1(109.4,81) 109.4,80.005 109.605,79.8 U1.20@110.3,79.8
  Bottom Layer w0.35: v1(101.5,88.8) 105.1,88.8 109.3,84.6 v1@109.3,81.2
MCU_SWDIO: J1.2 U1.19 | length 19.5
  Top Layer w0.35: J1.2 v1@100.3,88.5 ; v1(108.4,81) 108.352,80.952 108.352,79.748 109,79.1 U1.19
  Bottom Layer w0.35: v1(100.386,88.714) 101.2,87.9 105,87.9 108.4,84.5 v1@108.4,81.1
MCU_VBAT: R3.1 R4.2 U1.6 | length 10.6
  Top Layer w0.3: 104.764,71.55 104.764,72.724 104.94,72.9 106.8,72.9 107.5,73.6 107.5,75.7 106.71,76.49 105.16,76.49 U1.6
  Top Layer w0.5: R3.1 104.764,71.55 R4.2
NetB1_1: B1.1 Q1.4 | length 6.2
  Top Layer w0.4: B1.1 122.46,59.945 121.555,59.945 121.2,60.3 121.2,62.1 122.655,63.555 Q1.4
NetB1_2: B1.2 R12.2 | length 2.2
  Top Layer w0.5: B1.2 124.45,60.8 124.6,60.95 R12.2@124.6,61
NetB1_3: B1.3 Q1.6 | length 7.5
  Top Layer w0.4: Q1.6 122.715,66.19 124.166,66.19 124.4,65.955 124.4,61.984 124.166,61.75 122.95,61.75 B1.3@122.9,61.7
NetB1_5: B1.5 C13.2 R13.1 | length 14.7
  Top Layer w0.5: v1(118.1,60.9) B1.5@119.8,60.9
  Top Layer w0.8: C13.2 117.6,67.907 117.893,68.2 R13.1@118.9,68.2
  Bottom Layer w0.5: v1(118.1,60.9) 116.8,62.2 116.8,68.8 117.581,69.581 118.981,69.581 v1(119,69.6)
NetC2_1: C2.1 R1.2 X1.1 | length 2.8
  Top Layer w0.4: X1.1 101,78.95 101.8,78.95 R1.2@102.1,78.65 ; R1.2 102.05,79.85 C2.1@102.1,79.9
NetC9_2: C9.2 FB2.1 J2.A4B9 J2.B4A9 | length 19.6
  Top Layer w0.6: FB2.1 126.75,70.45 C9.2@126.8,70.5 ; C9.2 126.9,70.7 127.9,69.7 130.695,69.7 ; FB2.1@127,68.9 127.3,68.9 ; v1(128.3,75.3) 129.419,75.3 130.219,74.5 J2.B4A9
  Top Layer w0.8: 127.3,68.9 v1(128.4,67.8)
  Bottom Layer w0.8: v1(128.3,75.3) 129.3,74.3 129.3,68.7 v1(128.4,67.8)
NetC11_1: C11.1 J3.1 L1.1 R3.2 U2.4 U2.5 | length 39.1
  Top Layer w0.5: 97.4,66.3 97.4,56.1 99.9,53.6 106.307,53.6 106.6,53.893 106.6,53.9 107.6,54.9 ; 97.5,66.4 102.55,71.45 R3.2
  Top Layer w0.8: C11.1@106.44,55 J3.1 110.75,57.6 L1.1@111.1,57.95 ; C11.1@106.5,55.4 106.635,55.535 106.635,56.695 106.74,56.8 U2.4 U2.5@106.92,57.645
NetD1_A: D1.A R18.2 | length 2
  Top Layer w0.5: R18.2 109.75,70.75 109.9,70.9 D1.A@109.9,71.2
NetD2_A: D2.A L1.2 U2.1 | length 10.6
  Top Layer w0.8: U2.1 104.76,58.7 107,60.94 D2.A@107,62.7 ; D2.A 107.7,64.4 L1.2@112.3,64.4
NetD3_K: D3.K R10.2 | length 1.7
  Top Layer w0.3: D3.K@129.5,53 R10.2
NetD4_K: D4.K R11.2 | length 1.8
  Top Layer w0.3: R11.2 131.75,52.95 D4.K@131.8,52.9
NetD5_A: D5.A R20.2 | length 1.3
  Top Layer w0.5: D5.A@131.4,87.2 131.4,87 R20.2
NetJ2_A5: J2.A5 R6.2 | length 3.2
  Top Layer w0.3: R6.2 128.45,71.2 128.8,70.85 J2.A5
NetJ2_B5: J2.B5 R5.2 | length 2.9
  Top Layer w0.3: R5.2 129.6,74.2 129.95,73.85 J2.B5@131.2,73.85
NetJ5_1: J5.1 R16.2 | length 2.9
  Top Layer w0.8: R16.2 112.75,91.115 112.835,91.2 J5.1@113,91.2
NetJ6_1: J6.1 R19.2 U1.13 | length 37.5
  Top Layer w0.3: U1.13 v1(112.5,75.2) ; v1(131.8,89.3) 131.861,89.3 132.361,88.8 133,88.8 133.686,89.486 134.486,89.486 R19.2@134.5,89.5 ; J6.1@132,91.1 132.3,90.8 133.8,90.8 134.276,90.324 134.276,89.9 134.526,89.65 R19.2@134.55,89.65
  Bottom Layer w0.3: v1(112.5,75.2) 113,75.2 117,79.2 117,86.1 118,87.1 124.4,87.1 126.6,89.3 v1(131.8,89.3)
NetP1_2: P1.2 R15.1 U1.17 | length 20.3
  Top Layer w0.3: U1.17 111.8,77.8
  Top Layer w0.4: 111.8,77.8 111.878,77.8 112.278,78.2 112.8,78.2 ; v1@112.8,78.9 112.8,78.2 ; R15.1 114.75,78.4 114.55,78.2 112.8,78.2
  Bottom Layer w0.4: P1.2 106.44,89.96 112.8,83.6 v1(112.8,79)
NetP2_3: P2.3 R17.2 U1.7 | length 30.4
  Top Layer w0.3: U1.7 105.16,75.84 106.16,75.84 v1(106.6,75.4)
  Bottom Layer w0.3: v1(106.6,75.4) 106.6,76.08 106.9,76.38 107.6,76.38 107.9,76.68 107.9,77.98 108.2,78.28 113.5,78.28 114.5,79.28 114.5,87.38 113.5,88.38 113.5,89.08 114,89.58 118.5,89.58 119.111,90.192 119.111,90.83 119.782,91.5 P2.3
NetQ1_2: Q1.2 Q1.5 | length 2.2
  Top Layer w0.6: Q1.2 Q1.5@122.35,65.3
NetR7_1: R7.1 R8.2 U2.3 | length 4.2
  Top Layer w0.4: R8.2@101.9,58.8 101.825,58.725 101.825,57.575 R7.1 102.9,57.55 103.555,56.895 104.305,56.895 U2.3@104.4,56.8
NetR9_2: R9.2 U3.2 | length 2.3
  Top Layer w0.4: R9.2@131,64.5 131,63.621 131.25,63.371 131.25,63.144 131.285,63.109 131.285,62.91 131.4,62.795 U3.2@131.4,62.4
NetR10_1: R10.1 U3.6 | length 3.5
  Top Layer w0.3: R10.1@128,54.8 128.05,54.8 128.92,55.67 129.295,55.67 130.115,56.49 U3.6
NetR11_1: R11.1 U3.7 | length 3.3
  Top Layer w0.3: U3.7 131.385,56.49 132.875,55 133,55 R11.1@133.3,54.7
NetR16_1: R16.1 U1.12 | length 26.8
  Top Layer w0.3: U1.12 111.85,74.55 v1(112.5,73.9) ; R16.1@114.6,88.4 114.8,88.6 v1(115.7,88.6)
  Bottom Layer w0.3: v1@112.5,73.8 112.4,73.9 109.6,73.9 109.1,74.4 109.1,77.124 109.276,77.3 114.1,77.3 115.9,79.1 115.9,88.319 115.7,88.519 v1(115.7,88.6)
NetR18_1: R18.1 U1.14 | length 5.6
  Top Layer w0.3: R18.1 108.25,73.15 108.8,73.7 108.8,75.724 108.976,75.9 U1.14@110.1,75.9
pads on no net: B1.4 J1.6 J1.MH J2.A6 J2.A7 J2.A8 J2.B6 J2.B7 J2.B8 J2.MH J2.SH U1.8 U1.9 U1.10 U1.11 U2.6 U3.9

## Silkscreen, mask and mechanical layers (free items; w line width, h text height)
Mechanical 15:
  the board outline again, w0.254

## Text inside footprints (layer, text, board x,y; h text height)
D1: Mechanical 13 "+" at 109.183,70.25 h1 r180
D3: Mechanical 13 "+" at 127.433,52.292 h0.5 r180
D4: Mechanical 13 "+" at 133.817,53.508 h0.5
D5: Mechanical 13 "+" at 131.967,88.5 h1